# EAGLE board Relay Board A (EAGLE 8.1.0)
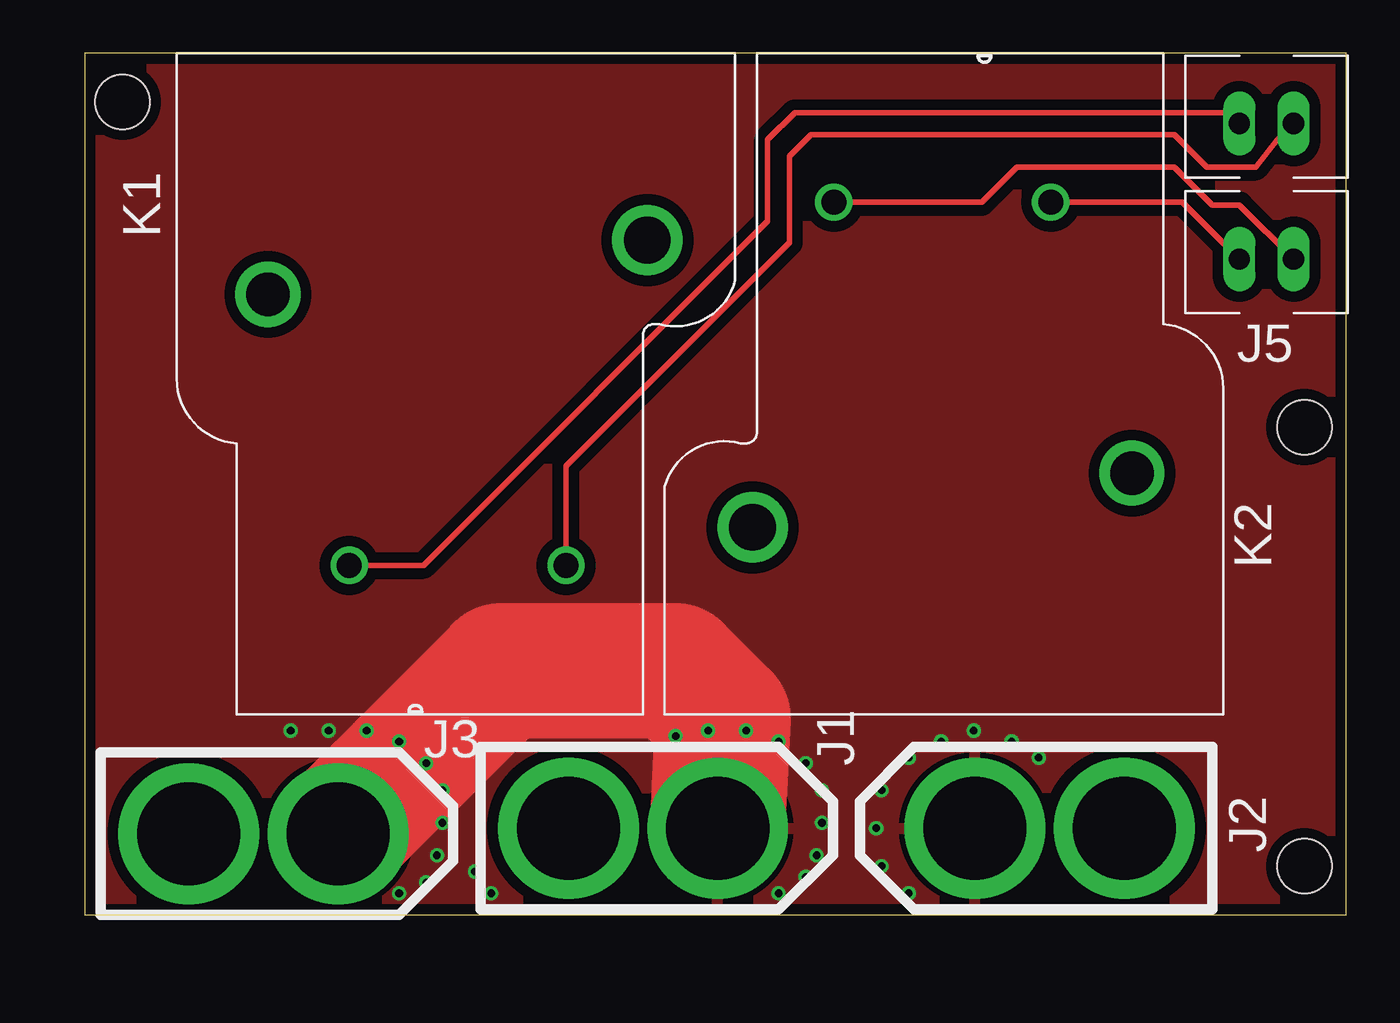
[diagram p0: board, top side]
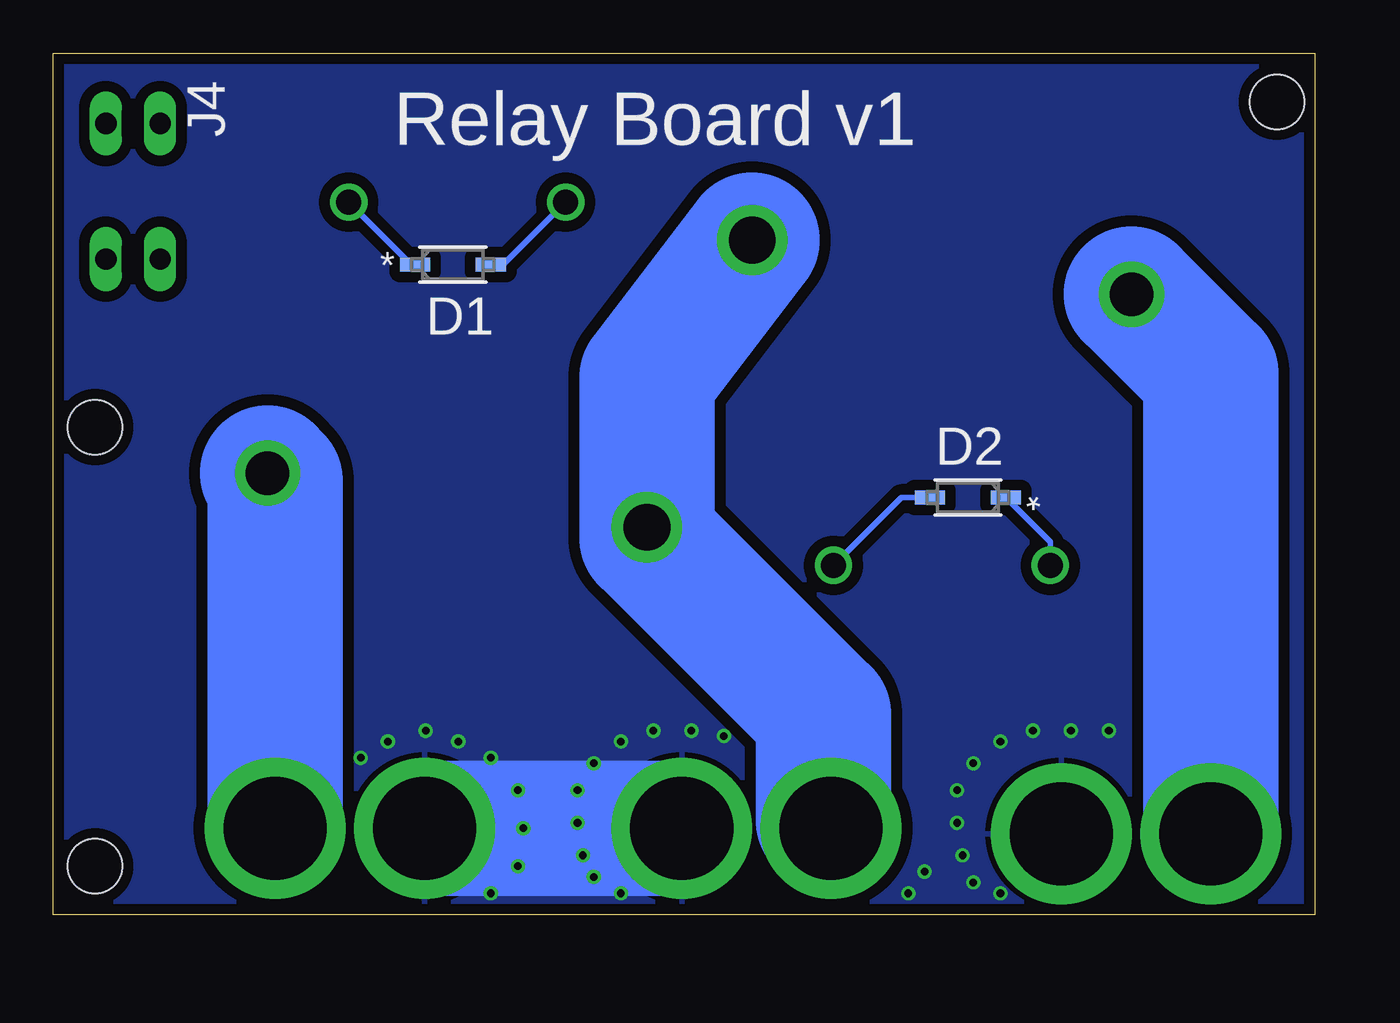
[diagram p1: board, bottom side, seen from below]

Size 59.11 x 40.38 mm. Coordinates in mm from the lower left corner, seen from the top.
Outline: 0,0 59.11,0 59.11,40.38 0,40.38 0,0
Copper layers (1*16): Top 0.035mm / dielectric 1.6mm / Bottom 0.035mm
Design rules "Elecrow_2-layer_PCB_eagle_rule": minimum track width 6mil, minimum drill 12mil, track to track 6mil, track to pad 6mil, pad to pad 6mil, via to via 8mil, smd to smd 0mil, copper to edge 20mil, drill to drill 10mil, minimum pad ring 6mil, minimum via ring 6mil, stop-mask expansion 0mil, vias tented up to drill 100mil, thermal gap 10mil
Holes 2.54 mm at 1.78,38.1 57.15,22.86 57.15,2.29

## Footprints (pad centres in the part's own frame; a part is rotated, then mirrored left to right if it is on the bottom)
SOD123-M = smd 1.416 x 0.652: A 1.776,0; C -1.776,0
XT60_CONNECTOR = drill 4.826 pad 6.604: + 3.5,0; - -3.5,0
XH_CONNECTOR = drill 1.001 long: 1 -1.27,0; 2 1.27,0
RELAY_T9AS = drill 1.168 pad 1.676: 2 -4.369,-9.271; 7 5.791,-9.271 | drill 2.032 pad 3.048: 3 -8.179,3.429 | drill 2.184 pad 3.302: 6 9.601,5.969

## Placement (x,y rotation side)
D1  [SOD123-M]  40.39,30.48 0 bottom
D2  [SOD123-M]  16.26,19.56 180 bottom
J1  ESC_CONTACTS  [XT60_CONNECTOR]  26.16,4.06 180 top
J2  ESC_CONTACTS  [XT60_CONNECTOR]  45.21,4.06 0 top
J3  ESC_CONTACTS  [XT60_CONNECTOR]  8.38,3.81 180 top
J4  POWER_CONNECTOR  [XH_CONNECTOR]  55.37,37.08 0 top
J5  POWER_CONNECTOR  [XH_CONNECTOR]  55.37,30.73 0 top
K1  [RELAY_T9AS]  40.89,24.13 180 top
K2  [RELAY_T9AS]  16.76,25.65 0 top

## Library data of the parts
D1 D2 = 1n4148w-diode; COPYRIGHT: Copyright C 2015 Accelerated Designs. All rights reserved; MANUFACTURER_PART_NUMBER: 1N4148W7F; VENDOR: Diodes Inc
J1-J5 = thanics_robotics
K1 K2 = 30a-relay; COPYRIGHT: Copyright C 2015 Accelerated Designs. All rights reserved; MANUFACTURER_PART_NUMBER: T9AS1D1224; VENDOR: Tyco Electronics

## Nets
GND: J1.- J2.- J3.-
N$1: J1.+ K1.6 K2.6
N$2: J2.+ K1.3
N$4: J3.+ K2.3
N$7: D1.C J5.1 K1.2
N$8: D1.A J5.2 K1.7
N$9: D2.C J4.1 K2.2
N$10: D2.A J4.2 K2.7

## Tracks (layer width: path | path; a pad name or v marks a point on that pad's centre or on a via)
GND  (via drill 0.36)
  Top 6.35: J3.- 19.5,11.43 27.69,11.43 29.92,9.2 J1.-
  Bottom 6.35: J1.- J2.-
  other vias: 9.65,8.64 11.43,8.64 13.21,8.64 14.73,8.13 18.29,2.03 16,7.11 16.76,5.84 16.76,4.32 16.51,2.79 16,1.52 14.73,1.02 19.05,1.02 27.69,8.38 29.21,8.64 30.99,8.64 32.51,8.13 37.34,2.29 33.78,7.11 34.54,5.84 34.54,4.32 34.29,2.79 33.78,1.78 32.51,1.02 38.61,1.02 37.08,4.06 37.34,5.84 38.61,7.37 40.13,8.13 41.66,8.64 43.43,8.13 44.7,7.37
  pour Top (isolate 0.508): 0,40.39 59.18,40.39 59.18,0 0,0
  pour Bottom (isolate 0.508): 0,40.39 59.18,40.13 59.18,-0.25 0,0
N$1
  Bottom 6.35: J1.+ 23.03,4.44 23.03,9.41 31.29,17.67 K1.6 31.29,25.17 K2.6
N$2
  Bottom 6.35: J2.+ 48.71,20.34 K1.3
N$4
  Bottom 6.35: J3.+ 4.88,25.38 K2.3
N$7
  Top 0.254: K1.2 51.44,33.4 J5.1
  Bottom 0.254: D1.C 42.34,30.48 K1.2
N$8
  Top 0.254: K1.7 42.04,33.4 43.69,35.05 51.05,35.05 52.83,33.27 54.1,33.27 J5.2
  Bottom 0.254: D1.A 38.02,30.48 K1.7
N$9
  Top 0.254: K2.2 15.88,16.38 32,32.51 32,36.32 33.27,37.59 53.59,37.59 J4.1
  Bottom 0.254: K2.2 12.39,17.47 D2.C
N$10
  Top 0.254: K2.7 22.55,21.03 33.02,31.5 33.02,35.56 34.04,36.58 51.05,36.58 52.58,35.05 54.86,35.05 55.88,36.32 J4.2
  Bottom 0.254: D2.A 19.38,19.56 K2.7

## Text on the board
tPlace: K1 | J5 | K2 | J3 | J1 | J2
bPlace: J4
bNames: Relay Board v1 | D1 | D2